# Altium PCB Temperature Controller.PcbDoc
Units mm, origin at the board's own origin, x right, y up, seen from the top; angles counter-clockwise.
Board outline 40 x 55 mm, 2 copper layers (Top Layer, Bottom Layer), stack 1.57 mm thick; 31 components, 21 nets, 97 pads, 309 vias.
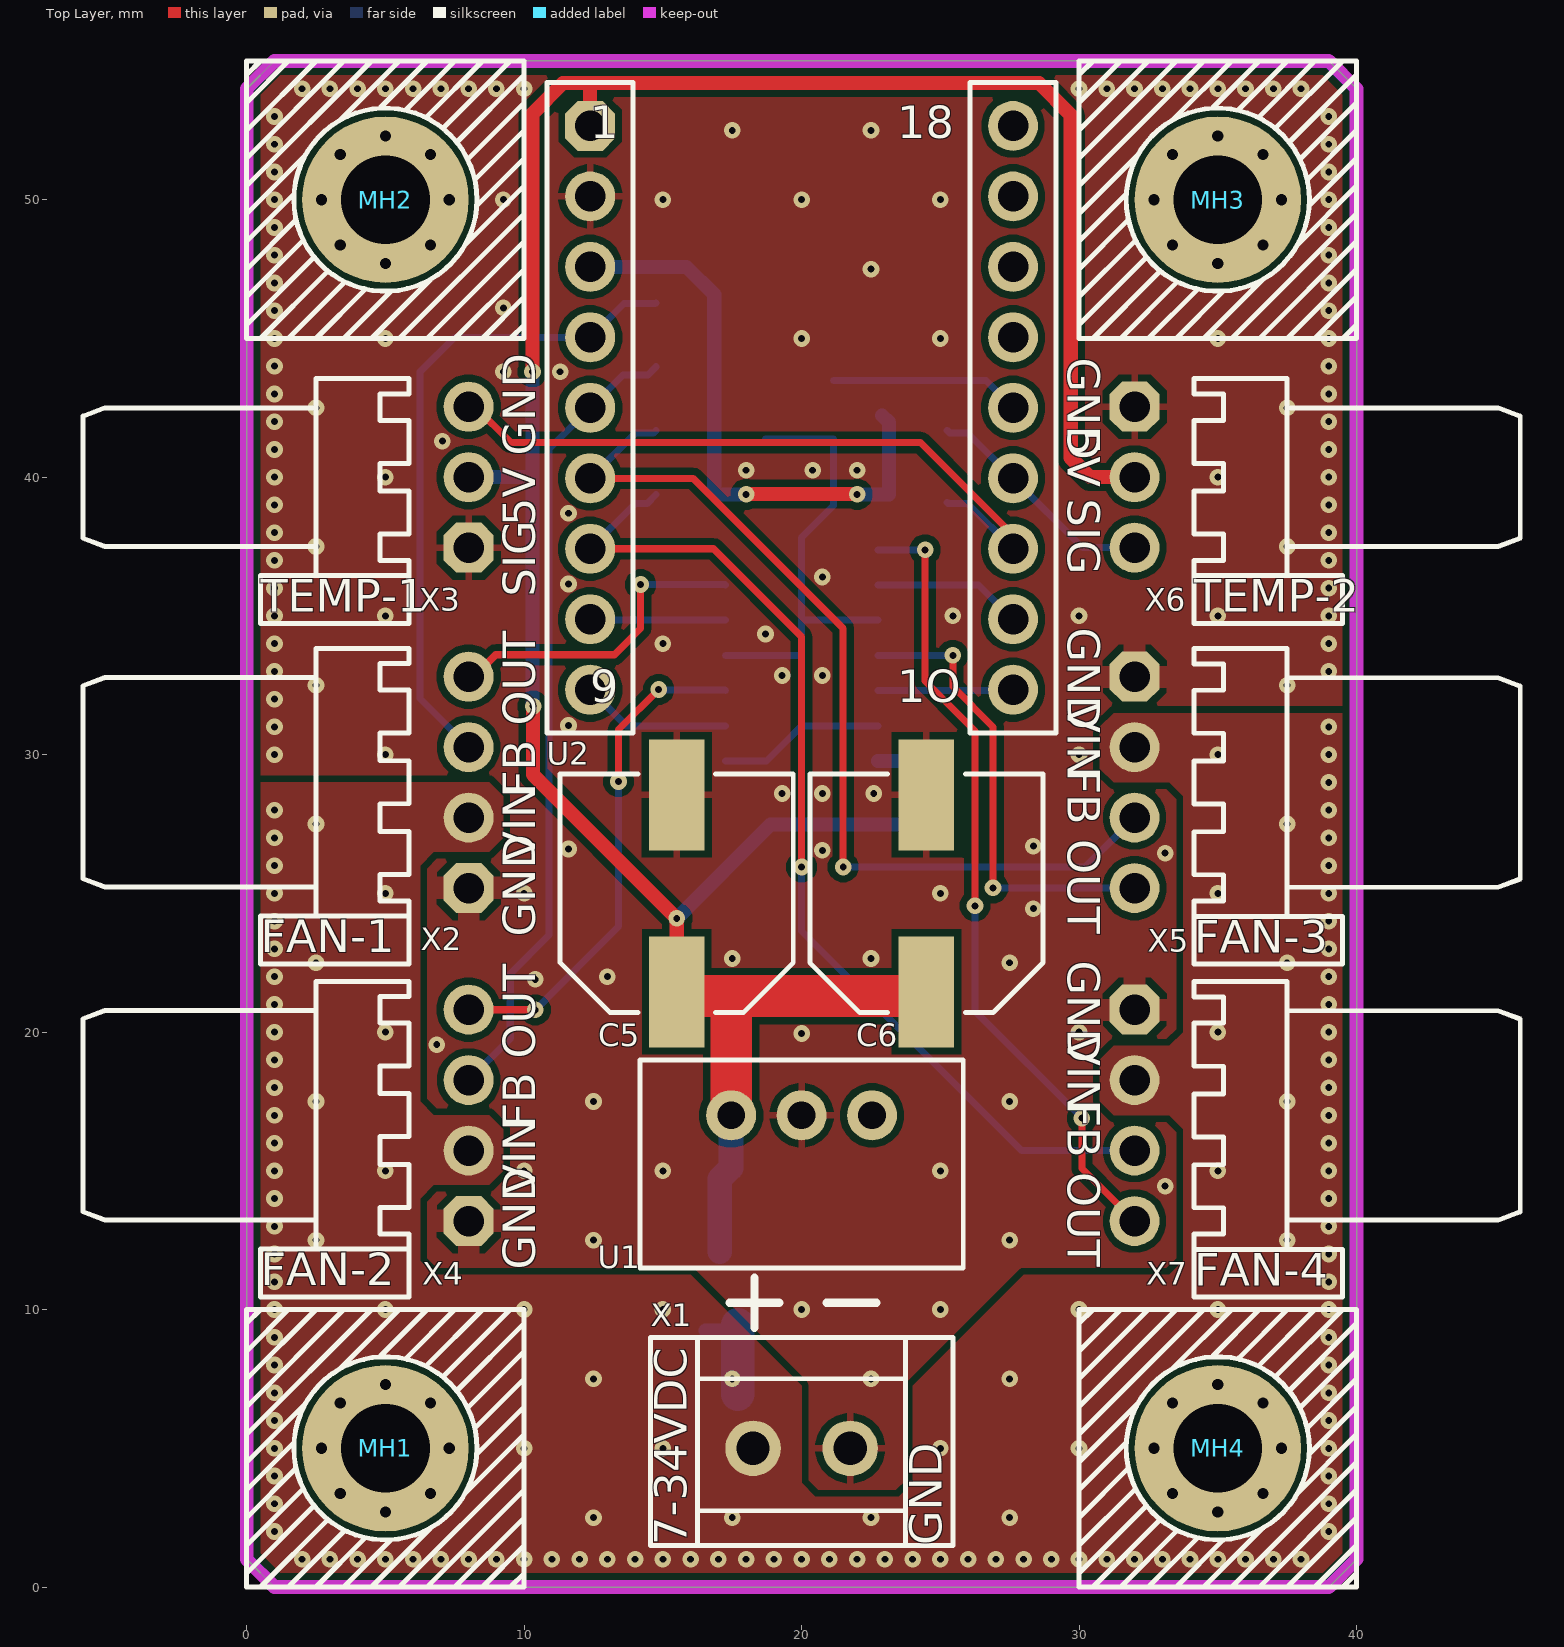
[diagram p0: Top Layer view]
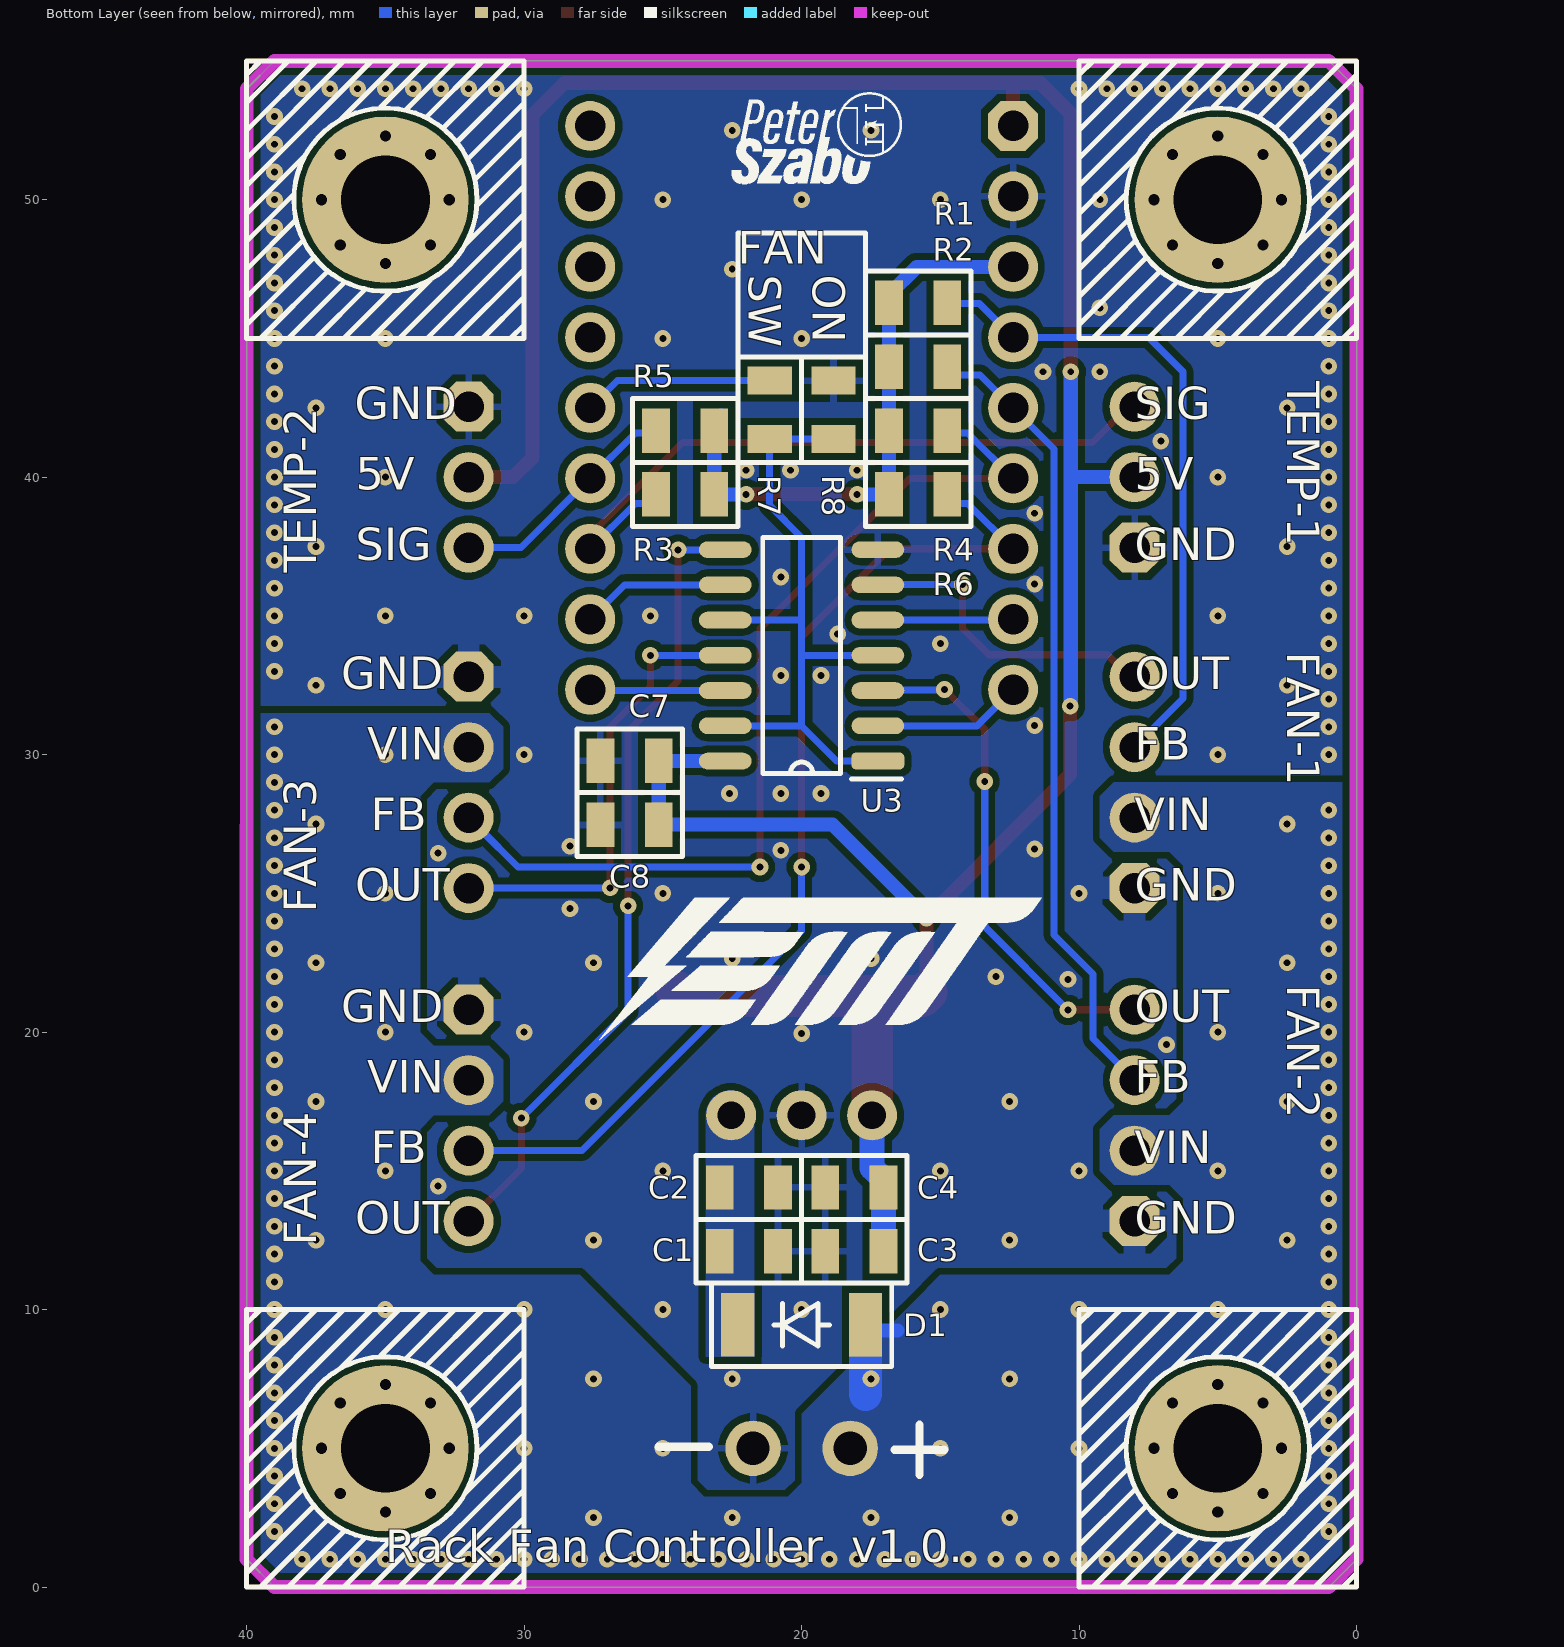
[diagram p1: Bottom Layer view, seen from below]

## Layer stack, top to bottom
Top Solder: solder mask 0.0102, Solder Resist, Dk 3.5
Top Layer: signal copper 0.035
Dielectric1: core 1.5, FR-4, Dk 4.8
Bottom Layer: signal copper 0.035
Bottom Solder: solder mask 0.0102, Solder Resist, Dk 3.5

## Board outline
1,55 39,55 40,54 40,1 39,0 1,0 0,1 0,54

## Design rules (kind name [scope] priority, off if disabled: settings)
AssemblyTestPointUsage [All] p1 off:
AssemblyTestpoint [All] p1 off: testpointundercomponent=TRUE minsize=1.016 maxsize=2.54 preferedsize=1.524 minholesize=0 maxholesize=1.016 preferedholesize=0.813 testpointgrid=0.025 usegrid=TRUE gridtolerance=0 allowsidetop=TRUE allowsidebottom=TRUE
Clearance ClearanceHV [InNetClass('HighVoltage')] p1: gap=0.5 ignorepadtopadclearanceinfootprint=FALSE except(0: Arc-Hole Track-Hole SMDPad-Hole THPad-Hole Via-Hole Fill-Hole Poly-Hole Region-Hole Text-Hole)
Clearance ClearanceFill [InPolygon vs InPolygon] p2: gap=0.25 ignorepadtopadclearanceinfootprint=FALSE except(0: Arc-Hole Track-Hole SMDPad-Hole THPad-Hole Via-Hole Fill-Hole Poly-Hole Region-Hole Text-Hole)
Clearance Poligone [InPolygon vs not InPolygon] p3: gap=0.25 ignorepadtopadclearanceinfootprint=FALSE except(0: Arc-Hole Track-Hole SMDPad-Hole THPad-Hole Via-Hole Fill-Hole Poly-Hole Region-Hole Text-Hole)
Clearance Clearance-xPP-xTP-xTT [All] p4: gap=0.15 ignorepadtopadclearanceinfootprint=FALSE except(0: Arc-Hole Track-Hole SMDPad-Hole THPad-Hole Via-Hole Fill-Hole Poly-Hole Region-Hole Text-Hole)
ComponentClearance [All] p1: gap=0.25 collisioncheckmode=3 verticalgap=0.25 showdistances=FALSE
DiffPairsRouting [All] p1: maxlimit=0.25 minlimit=0.15 mostfreqgap=0.25 toplayer_minwidth=0.254 toplayer_maxwidth=0.381 toplayer_prefwidth=0.381 bottomlayer_minwidth=0.254 bottomlayer_maxwidth=0.381 bottomlayer_prefwidth=0.381 substack1={06652235-AFCE-417E-9911-24E9A01F5C8B} toplayer_{06652235-afce-417e-9911-24e9a01f5c8b}_mingap=0.25 toplayer_{06652235-afce-417e-9911-24e9a01f5c8b}_minwidth=0.381 toplayer_{06652235-afce-417e-9911-24e9a01f5c8b}_maxwidth=0.381 toplayer_{06652235-afce-417e-9911-24e9a01f5c8b}_prefwidth=0.381 bottomlayer_{06652235-afce-417e-9911-24e9a01f5c8b}_mingap=0.25 bottomlayer_{06652235-afce-417e-9911-24e9a01f5c8b}_minwidth=0.381 bottomlayer_{06652235-afce-417e-9911-24e9a01f5c8b}_maxwidth=0.381 bottomlayer_{06652235-afce-417e-9911-24e9a01f5c8b}_prefwidth=0.381 maxuncoupledlength=12.5
FanoutControl Fanout_BGA [IsBGA] p1 off: bgadir=Out bgaviamode=Centered fanoutstyle=Auto fanoutdirection=Alternating viagrid=0.025 // Fanout_BGA (Default Rule)
Height [All] p1: minheight=0 maxheight=508 prefheight=12.5
HoleSize HoleSize-PTH [All] p1: absolutevalues=TRUE maxlimit=12.7 minlimit=0.25 maxpercent=80.000 minpercent=20.000
HoleToHoleClearance [All] p1: gap=0.15 allowstackedmicrovias=TRUE
MinimumAnnularRing "Minimum IAR  >0.45mm" [((ObjectKind = 'Pad') OR (ObjectKind = 'Via')) And (Layer = 'MultiLayer') And (HoleDiameter > AsMM(0.45))] p1: minimumring=0.125 // minimum inner annular ring for pads > 0.45mm finished hole size
MinimumAnnularRing "Minimum IAR <=0.45mm" [((ObjectKind = 'Pad') OR (ObjectKind = 'Via')) And (Layer = 'MultiLayer') And (HoleDiameter <= AsMM(0.45))] p2: minimumring=0.125 // minimum inner annular ring for pads <= 0.45mm finished hole size
MinimumSolderMaskSliver [All] p1: minsoldermaskwidth=0.1
PlaneClearance PlaneClearance-IPI [All] p1: clearance=0.4
PlaneConnect PlaneConnect_1 [All] p1: planeconnectstyle=Relief reliefexpansion=0.508 reliefentries=4 reliefconductorwidth=0.254 reliefairgap=0.254
PlaneConnect [All] p2: planeconnectstyle=Relief reliefexpansion=0.4 reliefentries=4 reliefconductorwidth=0.508 reliefairgap=0.254
PolygonConnect PolygonConnect-xTW [InNet('GND') vs IsVia] p1: connectstyle=Direct reliefconductorwidth=0.508 reliefentries=4 polygonreliefangle="90 Angle" airgapwidth=0.254
PolygonConnect PolygonConnect_1 [InNet('GND') vs (InComponent('X2')  Or   InComponent('X4') Or   InComponent('X5') Or   InComponent('X7'))] p2: connectstyle=Relief reliefconductorwidth=0.8 reliefentries=4 polygonreliefangle="90 Angle" airgapwidth=0.254
PolygonConnect PolygonConnect_2 [InNet('GND') vs not(IsVia)] p3: connectstyle=Relief reliefconductorwidth=0.254 reliefentries=4 polygonreliefangle="90 Angle" airgapwidth=0.254
PolygonConnect [All] p4: connectstyle=Direct reliefconductorwidth=0.381 reliefentries=4 polygonreliefangle="90 Angle" airgapwidth=0.25
RoomDefinition "Temperature Controller" [InComponentClass('Temperature Controller')] p1: confinementstyle=ConfineIn formatcopy=TRUE lockcomponents=FALSE outline 18.649,-23.6 47.999,-23.6 47.999,-13.8 18.649,-13.8
RoutingCorners [All] p1: cornerstyle=45-Degree minsetback=2.5 maxsetback=2.5
RoutingVias "RoutingVias > 0.45mm" [(ObjectKind = 'Via') And (HoleDiameter > AsMM(0.45))] p1: holewidth=0.25 width=0.6 viastyle="Through Hole" minholewidth=0.25 minwidth=0.5 maxholewidth=0.9 maxwidth=1.4 // finishet hole size > 0.45mm
RoutingVias "RoutingVias <= 0.45mm" [(ObjectKind = 'Via') And (HoleDiameter <= AsMM(0.45))] p2: holewidth=0.25 width=0.6 viastyle="Through Hole" minholewidth=0.25 minwidth=0.5 maxholewidth=0.5 maxwidth=1 // finishet hole size <= 0.45mm
SilkToSilkClearance [All] p1: silktosilkclearance=0.2
SilkToSolderMaskClearance SilkscreenOverComponentPads [IsPad] p1: minsilkscreentomaskgap=0.15 clearancetoexposedcopper=TRUE
SolderMaskExpansion [All] p1: expansion=0.1 istentingtop=FALSE
Width Width-xTW [All] p1: maxlimit=5 minlimit=0.23 preferedwidth=0.254 substack1={06652235-AFCE-417E-9911-24E9A01F5C8B} toplayer_{06652235-afce-417e-9911-24e9a01f5c8b}_maxwidth=2.54 bottomlayer_{06652235-afce-417e-9911-24e9a01f5c8b}_maxwidth=2.54
16 further rules are at their usual default settings.

## Classes and differential pairs
component class "Temperature Controller": C1 C3 C5 C7 C8 D1 MH1 MH2 MH3 MH4 R1 R2 R3 R4 R5 R6 R7 R8 U1 U2 U3 X1 X2 X3 X4 X5 X6 X7

## Components (designator, comment, footprint, x,y, rotation, side; value= is the part's Value field where it differs from the comment)
C1 "1uF" CAP-0805 21.9,12.1 r0 bottom
C2 "100nF" CAP-0805 21.9,14.4 r0 bottom
C3 "100nF" CAP-0805 18.1,12.1 r180 bottom
C4 "1uF" CAP-0805 18.1,14.4 r180 bottom
C5 "470uF" CAP-ELCO-SMD-FK1 15.5,25 r90 top
C6 "470uF" CAP-ELCO-SMD-FK1 24.5,25 r90 top
C7 "100nF" CAP-0805 26.2,29.78 r180 bottom
C8 "1uF" CAP-0805 26.2,27.48 r180 bottom
D1 "SL34F" D-SMAF 20,9.45 r0 bottom
MH1 "MECH-SCREW" MECH-M3-LARGE-EMPTY-DOUBLE-SUPPORT 5,5 r0 top locked value="M3 hole"
MH2 "MECH-SCREW" MECH-M3-LARGE-EMPTY-DOUBLE-SUPPORT 5,50 r0 top locked value="M3 hole"
MH3 "MECH-SCREW" MECH-M3-LARGE-EMPTY-DOUBLE-SUPPORT 35,50 r0 top locked value="M3 hole"
MH4 "MECH-SCREW" MECH-M3-LARGE-EMPTY-DOUBLE-SUPPORT 35,5 r0 top locked value="M3 hole"
R1 "4K7" RES-0805 15.8,46.28 r0 bottom
R2 "4K7" RES-0805 15.8,43.98 r0 bottom
R3 "4K7" RES-0805 24.2,39.38 r180 bottom
R4 "4K7" RES-0805 15.8,41.68 r0 bottom
R5 "4K7" RES-0805 24.2,41.68 r180 bottom
R6 "4K7" RES-0805 15.8,39.38 r0 bottom
R7 "0R" RES-0805 21.15,42.43 r270 bottom
R8 "0R" RES-0805 18.85,42.43 r270 bottom
U1 "AMSR-7805-NZ" IC-AMS-7805 20,17 r180 top
U2 "ESP32-C3-ZERO" MOD-ESP32-C3-ZERO 20,42.5 r0 top
U3 "74HCT125" IC-SOIC-14 20,33.58 r0 bottom
X1 "CONN-2P" CONN-2P-TERMINAL 20,5 r0 top value=TL002V-02P
X2 "CONN-4P" CONN-4P-NCW254 8,29 r90 top value=NCW254-04RR
X3 "CONN-3P" CONN-3P-NCW254 8,40 r90 top value=NCW254-03RR
X4 "CONN-4P" CONN-4P-NCW254 8,17 r90 top value=NCW254-04RR
X5 "CONN-4P" CONN-4P-NCW254 32,29 r270 top value=NCW254-04RR
X6 "CONN-3P" CONN-3P-NCW254 32,40 r270 top value=NCW254-03RR
X7 "CONN-4P" CONN-4P-NCW254 32,17 r270 top value=NCW254-04RR

## Footprints (in the part's own frame and the unit in brackets; to place one, negate y for a bottom-side part, rotate by r counter-clockwise, add the part's x,y. Pads: shape width x height; smd on the part's side, far side on the other; paste and mask are expansions set on the pad)
CAP-0805 [mm]
  rect 1x1.6 smd: 1(-1.05,0) 2(1.05,0)
  silkscreen extent -1.9,-1.15 1.9,1.15, body extent -1,-0.63 1,0.64, height 0.52
CAP-ELCO-SMD-FK1 [mm]
  rect 4x2 smd: 1(3.55,0) 2(-3.55,0)
  silkscreen extent -4.3,-4.2 4.3,4.2, body extent -4.85,-4.15 4.85,4.15, height 10.2
CONN-2P-TERMINAL [mm]
  round 2 hole 1.2: 1(-1.75,0) 2(1.75,0)
  silkscreen extent -3.75,-3.5 3.75,4, body extent -3.9,-3.5 3.5,3.9, height 8.6
CONN-3P-NCW254 [mm]
  oct 1.8x1.8 hole 1.1: 1(-2.54,0)
  round 1.8 hole 1.1: 2(0,0) 3(2.54,0)
  silkscreen extent -3.55,2.15 3.55,13.9, body extent -3.54,-0.3 3.54,13.9, height 5.85
CONN-4P-NCW254 [mm]
  oct 1.8x1.8 hole 1.1: 1(-3.81,0)
  round 1.8 hole 1.1: 2(-1.27,0) 3(1.27,0) 4(3.81,0)
  silkscreen extent -4.82,2.15 4.83,13.9, body extent -4.81,-0.3 4.81,13.9, height 5.85
D-SMAF [mm]
  rect 1.2x2.3 smd: A(-2.3,0) K(2.3,0)
  silkscreen extent -3.25,-1.5 3.25,1.5, body extent -2.65,-1.27 2.65,1.27, height 1
IC-AMS-7805 [mm]
  round 1.8 hole 1: 1(-2.54,0) 2(0,0) 3(2.54,0)
  silkscreen extent -5.83,-2 5.82,5.5, body extent -5.8,-2 5.8,5.5, height 10.16
IC-SOIC-14 [mm] "SOIC, 16-Leads, Body 9.9x3.9mm, Pitch 1.27mm, IPC High Density"
  rrect50% 1.9x0.6 smd: 1(-2.75,3.81)
  oval 1.9x0.6 smd: 2(-2.75,2.54) 3(-2.75,1.27) 4(-2.75,0) 5(-2.75,-1.27) 6(-2.75,-2.54) 7(-2.75,-3.81) 8(2.75,-3.81) 9(2.75,-2.54) 10(2.75,-1.27) 11(2.75,0) 12(2.75,1.27) 13(2.75,2.54) 14(2.75,3.81)
  silkscreen extent -3.6,-4.25 1.4,4.46, body extent -2.99,-4.32 2.99,4.33, height 1.35
MECH-M3-LARGE-EMPTY-DOUBLE-SUPPORT [mm]
  round 6 hole 3.2: MH(0,0)
  silkscreen extent -5,-5 5,5
MOD-ESP32-C3-ZERO [mm]
  oct 1.8x1.8 hole 1.1: 1(-7.62,10.16)
  round 1.8 hole 1.1: 2(-7.62,7.62) 3(-7.62,5.08) 4(-7.62,2.54) 5(-7.62,0) 6(-7.62,-2.54) 7(-7.62,-5.08) 8(-7.62,-7.62) 9(-7.62,-10.16) 10(7.62,-10.16) 11(7.62,-7.62) 12(7.62,-5.08) 13(7.62,-2.54) 14(7.62,0) 15(7.62,2.54) 16(7.62,5.08) 17(7.62,7.62) 18(7.62,10.16)
  silkscreen extent -9.17,-11.72 9.17,11.72, body extent -9,-11.75 9,13, height 16.01
RES-0805 [mm]
  rect 1x1.6 smd: 1(-1.05,0) 2(1.05,0)
  silkscreen extent -1.9,-1.15 1.9,1.15, body extent -1,-0.63 1,0.63, height 0.48

## Part data
C1 C4 C8: library part SPN-RES-6099, "Capacitor Non-Polar", Tolerance=X7R, Voltage=50V, Distributor=Lomex, Internal ID=SPN-RES-6099, Order number=82-10-21
C2 C3 C7: library part SPN-RES-6084, "Capacitor Non-Polar", Tolerance=X7R, Voltage=50V, Distributor=Lomex, Internal ID=SPN-RES-6084, Order number=82-13-46
C5 C6: library part SPN-RES-6223, "470uF 16V", Voltage=16V, Distributor=Lomex, Internal ID=SPN-RES-6223, Order number=91-01-32
D1: library part SPN-DIO-0204, "3A 40V SCH.RECT. Vf=0.45V", Distributor=Lomex, Internal ID=SPN-DIO-0204, Link=https://lomex.hu/pdf/(yet)_sl34f%20thru%20sl310f.pdf, Order number=83-07-60
MH1 MH2 MH3 MH4: library part SPN-CON-0000.32, "M3, large ring, double support silkscreen", Distributor=N/A, Internal ID=SPN-CON-0000.32, Order number=N/A
R1 R2 R3 R4 R5 R6: library part SPN-RES-5313, "Resistor", Distributor=Lomex, Internal ID=SPN-RES-5313, Order number=80-10-94
R7 R8: library part SPN-RES-5161, "Resistor", Distributor=Lomex, Internal ID=SPN-RES-5161, Order number=81-10-02
U1: library part SPN-MOD-0012, "Converter: DC/DC, 2.5W, Uin: 6.5-32V, Uout: 5VDC, Iout: 500mA", Distributor=TME, Internal ID=SPN-MOD-0012, Link=https://www.tme.eu/hu/details/amsr-7805z/dc-dc-konverterek/aimtec/, Order number=AMSR-7805Z
U2: library part SPN-MOD-0433, "ESP32-C3 mini fejlesztőkártya, ESP32-C3FN4, egymagos processzor, 160 MHz, 2,4 GHz Wi-Fi, Bluetooth 5", Distributor=Hestore, Internal ID=SPN-MOD-0433, Link=https://www.hestore.hu/prod_10046642.html#, Order number=100.466.42
U3: library part SPN-ICS-0434, "QUADRUPLE BUS BUFFER GATES / WITH 3-STATE OUTPUTS", Distributor=Hestore, Internal ID=SPN-ICS-0434, Link=https://www.hestore.hu/prod_10021575.html, Order number=100.215.75
X1: library part SPN-CON-0315, "SORKAPOCS 2 P RM3.50 TL002V-02P (TLM) LIFTES 1.5qmm 10A 130V VDE", Distributor=Lomex, Internal ID=SPN-CON-0315, Link=https://lomex.hu/pdf/(tlm)_tl002v-xp-xs.pdf, Order number=43-22-49
X2 X4 X5 X7: library part SPN-CON-0429, "TÁPCSATL. 2.54mm 4P APA 90° REVERSE NCW254-04RR (G-S) FORR.", Distributor=Lomex, Internal ID=SPN-CON-0429, Link=https://lomex.hu/pdf/t-t/(t-t)_ncw254-xxrr.pdf, Order number=43-18-04
X3 X6: library part SPN-CON-0428, "TÁPCSATL. 2.54mm 3P APA 90° REVERSE NCW254-03RR (G-S) FORR.", Distributor=Lomex, Internal ID=SPN-CON-0428, Link=https://lomex.hu/pdf/t-t/(t-t)_ncw254-xxrr.pdf, Order number=43-18-03

## Via types
v1: diameter 0.6, hole 0.25, Top Layer to Bottom Layer, tented both sides, 273 vias
v2: diameter 0.6, hole 0.4, Top Layer to Bottom Layer, tented both sides, 36 vias

## Nets (pads, with @x,y where several pads share a name; then routed paths per layer and width w, separated by ;. In a path a pad name is that pad's centre, name@x,y a point inside that pad or via, vN(x,y) a via of type N, cw(c..) or ccw(c..) an arc to the next point about the centre after c; other vN are vias at no path point)
3V3: R1.2 R2.2 R3.2 R4.2 R5.2 R6.2 U2.3 | length 21.3
  Top Layer w0.508: v1@17.983,39.4 17.986,39.398 18.083,39.398 18.085,39.4 21.955,39.4 21.957,39.398 21.981,39.398 v1@21.983,39.4
  Bottom Layer w0.508: U2.3 15.85,47.58 16.85,46.58 R2.2 R4.2 R6.2 v1(18,39.38) ; v1(22,39.38) R3.2 R5.2 23.15,41.98 R5.2@22.904,42.226
5V: C3.2 C4.2 C5.2 C6.2 C7.2 C8.2 U1.3 U2.1 U3.14 X3.2 X6.2 | length 107.3
  Top Layer w0.508: v1(10.3,43.8) 10.3,53.1 11.4,54.2 12.35,54.2 ; v1(10.323,31.75) 10.323,29.277 v1(15.5,24.1) C5.2 ; U2.1 12.38,54.17 12.35,54.2 ; X6.2 30.4,40 29.7,40.7 29.7,53.05 28.55,54.2 12.35,54.2
  Top Layer w1.5: C5.2 15.65,21.3 17.35,21.3 ; U1.3@17.403,17.057 U1.3 17.46,21.19 17.35,21.3 ; C6.2 24.35,21.3 17.35,21.3
  Bottom Layer w0.508: X3.2 10.3,40 ; v1(10.3,43.8) 10.3,40 ; v1(10.323,31.75) 10.305,31.768 10.305,31.795 10.3,31.8 10.3,40 ; v1(15.5,24.1) 18.88,27.48 C8.2 C7.2 25.14,29.77 U3.14
  Bottom Layer w0.9: C3.2 C4.2 17.05,14.7 17.46,15.11 U1.3
FAN_1_PWM: U2.8 U3.5 | length 4.9
  Bottom Layer w0.254: U2.8 12.41,34.85 U3.5
FAN_1_PWM_EXT: U3.6 X2.4 | length 11.6
  Top Layer w0.254: X2.4 8.187,32.81 8.977,33.6 13.25,33.6 14.2,34.55 v1(14.2,36.13)
  Bottom Layer w0.254: v1(14.2,36.13) 14.205,36.125 17.245,36.125 U3.6
FAN_1_SENSE: R1.1 U2.4 X2.3 | length 23.8
  Bottom Layer w0.254: X2.3 6.25,32.02 6.25,43.8 7.49,45.04 U2.4 13.598,46.258 14.728,46.258 R1.1
FAN_2_PWM: U2.9 U3.2 | length 5.4
  Bottom Layer w0.254: U2.9 13.68,31.04 U3.2
FAN_2_PWM_EXT: U3.3 X4.4 | length 18.2
  Top Layer w0.254: X4.4 8.005,20.805 10.395,20.805 v1(10.4,20.8) ; v1(13.4,29.03) 13.4,30.9 v1(14.85,32.35)
  Bottom Layer w0.254: v1(10.4,20.8) 13.4,23.8 v1(13.4,29.03) ; v1(14.85,32.35) 14.87,32.33 17.23,32.33 U3.3
FAN_2_SENSE: R2.1 U2.5 X4.3 | length 29
  Bottom Layer w0.254: X4.3 9.5,19.77 9.5,22.1 10.9,23.5 10.9,41.02 13.568,43.688 14.458,43.688 R2.1
FAN_3_PWM: U2.10 U3.12 | length 4.9
  Bottom Layer w0.254: U3.12 27.59,32.31 U2.10
FAN_3_PWM_EXT: U3.11 X5.4 | length 17
  Top Layer w0.254: v1(25.45,33.58) 25.45,32.45 26.9,31 v1(26.9,25.2)
  Bottom Layer w0.254: U3.11 v1(25.45,33.58) ; v1(26.9,25.2) 26.905,25.195 31.575,25.195 X5.4@31.995,24.775
FAN_3_SENSE: R4.1 U2.6 X5.3 | length 34.1
  Top Layer w0.254: U2.6 16.09,39.96 21.5,34.55 v1(21.5,25.95)
  Bottom Layer w0.254: U2.6 14.018,41.598 14.668,41.598 R4.1@14.748,41.678 ; v1(21.5,25.95) 30.22,25.95 31.58,27.31 X5.3@32,27.31
FAN_4_PWM: U2.11 U3.9 | length 5.4
  Bottom Layer w0.254: U3.9 26.38,36.12 U2.11
FAN_4_PWM_EXT: U3.8 X7.4 | length 29
  Top Layer w0.254: v1(24.45,37.38) 24.45,32.65 26.25,30.85 v1(26.25,24.55) ; v1(30.1,16.9) 30.1,15.09 X7.4
  Bottom Layer w0.254: U3.8@22.76,37.38 v1(24.45,37.38) ; v1(26.25,24.55) 26.25,20.75 v1(30.1,16.9)
FAN_4_SENSE: R6.1 U2.7 X7.3 | length 38
  Top Layer w0.254: U2.7 16.83,37.42 20,34.25 v1(20,25.95)
  Bottom Layer w0.254: U2.7 14.018,39.058 14.438,39.058 R6.1@14.75,39.37 ; v1(20,25.95) 20,23.65 27.92,15.73 X7.3
FAN_nENABLE: R7.1 U2.14 | length 6.9
  Bottom Layer w0.254: R7.1 26.64,43.48 U2.14
GND: C1.1 C2.1 C3.1 C4.1 C5.1 C6.1 C7.1 C8.1 R8.1 U1.2 U2.2 U3.7 X1.2 X2.1 X3.1 X4.1 X5.1 X6.1 X7.1
  other v1: 22.5,7.5 20,10 25,10 12.5,12.5 27.5,12.5 33.1,14.45 10,15 15,15 25,15 12.5,17.5 27.5,17.5 6.85,19.55 20,19.95 30,20 10.4,21.9 13,22 27.5,22.5 17.5,22.65 22.5,22.65 28.35,24.45 10,25 25,25 33.1,26.45 20.75,26.55 11.6,26.6 28.35,26.7 19.3,28.6 20.75,28.6 22.6,28.6 1,30 5,30 30,30 1,31 11.6,31.05 1,32 2.5,32.5 37.5,32.5 19.3,32.85 20.75,32.85 1,33 39,33 1,34 15,34 39,34 18.7,34.35 1,35 5,35 25.45,35 30,35 35,35 39,35 1,36 39,36 11.6,36.15 20.75,36.4 1,37 39,37 2.5,37.5 37.5,37.5 1,38 39,38 11.6,38.7 1,39 39,39 1,40 5,40 35,40 39,40 18,40.25 20.4,40.25 22,40.25 1,41 39,41 7.05,41.3 1,42 39,42 2.5,42.5 37.5,42.5 1,43 39,43 9.25,43.8 11.3,43.8 1,44 39,44 1,45 5,45 20,45 25,45 35,45 39,45 1,46 39,46 9.25,46.1 1,47 39,47 22.5,47.5 1,48 39,48 1,49 39,49 1,50 9.25,50 15,50 20,50 25,50 39,50 1,51 39,51 1,52 39,52 17.5,52.5 22.5,52.5 1,53 39,53 2,54 3,54 4,54 5,54 6,54 7,54 8,54 9,54 10,54 30,54 31,54 32,54 33,54 34,54 35,54 36,54 37,54 38,54
NetC1_2: C1.2 C2.2 D1.K U1.1 | length 0.1
  Top Layer w1.5: U1.1 U1.1@22.597,17.057
NetR7_2: R7.2 R8.2 U3.1 U3.4 U3.10 U3.13 | length 24.8
  Bottom Layer w0.254: U3.1 18.74,29.77 20,31.03 ; U3.4 20,33.58 ; R8.2@18.702,41.38 R7.2 21.15,38.98 20,37.83 20,34.83 ; U3.13 20.01,31.04 20,31.03 ; U3.10 20.02,34.85 20,34.83 ; 20,31.03 20,33.58 ; 20,33.58 20,34.83
TEMP_1_IN: R3.1 U2.12 X3.3 | length 24.6
  Top Layer w0.254: X3.3 8.232,42.54 9.522,41.25 24.29,41.25 U2.12@27.62,37.92
  Bottom Layer w0.254: R3.1@25.25,39.088 25.28,39.058 25.982,39.058 U2.12
TEMP_2_IN: R5.1 U2.13 X6.3 | length 8.5
  Bottom Layer w0.254: R5.1 25.332,41.598 25.982,41.598 U2.13 30.12,37.46 X6.3
VIN: D1.A X1.1 X2.2 X4.2 X5.2 X7.2 | length 3.7
  Bottom Layer w0.5: 16.54,9.25 D1.A@17.7,9.25
  Bottom Layer w1.2: 17.7,6.95 D1.A
  other v1: 2,1 3,1 4,1 5,1 6,1 7,1 8,1 9,1 10,1 11,1 12,1 13,1 14,1 15,1 16,1 17,1 18,1 19,1 20,1 21,1 22,1 23,1 24,1 25,1 26,1 27,1 28,1 29,1 30,1 31,1 32,1 33,1 34,1 35,1 36,1 37,1 38,1 1,2 39,2 12.5,2.5 17.5,2.5 22.5,2.5 27.5,2.5 1,3 39,3 1,4 39,4 1,5 10,5 15,5 25,5 30,5 39,5 1,6 39,6 1,7 39,7 12.5,7.5 17.5,7.5 27.5,7.5 1,8 39,8 1,9 39,9 1,10 5,10 10,10 15,10 30,10 35,10 39,10 1,11 39,11 1,12 39,12 2.5,12.5 37.5,12.5 1,13 39,13 1,14 39,14 1,15 5,15 35,15 39,15 1,16 39,16 1,17 39,17 2.5,17.5 37.5,17.5 1,18 39,18 1,19 39,19 1,20 5,20 35,20 39,20 1,21 39,21 1,22 39,22 2.5,22.5 37.5,22.5 1,23 39,23 1,24 39,24 1,25 5,25 35,25 39,25 1,26 39,26 1,27 39,27 2.5,27.5 37.5,27.5 1,28 39,28 39,29 35,30 39,30 39,31
pads on no net: MH1.MH MH2.MH MH3.MH MH4.MH U2.15 U2.16 U2.17 U2.18
copper on no net:
  other v2: 5,2.7 35,2.7 3.374,3.374 6.626,3.374 33.374,3.374 36.626,3.374 2.7,5 7.3,5 32.7,5 37.3,5 3.374,6.626 6.626,6.626 33.374,6.626 36.626,6.626 5,7.3 5,7.3 35,7.3 35,7.3 5,47.7 35,47.7 3.374,48.374 6.626,48.374 33.374,48.374 36.626,48.374 2.7,50 7.3,50 32.7,50 37.3,50 3.374,51.626 6.626,51.626 33.374,51.626 36.626,51.626 5,52.3 5,52.3 35,52.3 35,52.3

## Polygon pours and split planes (outlines as drawn)
GND on Bottom Layer "GND_L02_P007" (solid, remove dead copper, pour order 7): 0,55 0,0 40,0 40,55
VIN on Bottom Layer "VIN_L02_P006" (solid, remove dead copper, pour order 6): 9.25,28.5 9.25,27 8.75,26.5 6.75,26.5 6.25,26 6.25,17.5 6.75,17 8.75,17 9.25,16.5 9.25,15 8.75,14.5 6.75,14.5 6.25,14 6.25,11.75 6.75,11.25 15,11.25 16,10.25 18.7,7.55 20,6.25 20,3.75 20.5,3.25 23.5,3.25 24,3.75 24,7.25 28,11.25 33.25,11.25 33.75,11.75 33.75,16.5 33.25,17 31.25,17 30.75,17.5 30.75,19 31.25,19.5 33.25,19.5 33.75,20 33.75,28.5 33.25,29 31.25,29 30.75,29.5 30.75,31 31.25,31.5 40,31.5 40,0 0,0 0,29 8.75,29
NetC1_2 on Bottom Layer "NETC1_2_L02_P000" (solid, remove dead copper, pour order 0): 21.7,8.3 21.7,17.05 cw(c22.55,17.05) 22.55,17.9 cw(c22.55,17) 23.45,17 23.45,8.3
GND on Top Layer "GND_L01_P008" (solid, remove dead copper, pour order 8): 0,55 0,0 40,0 40,55
VIN on Top Layer "VIN_L01_P005" (solid, remove dead copper, pour order 5): 9.25,28.5 9.25,27 8.75,26.5 6.75,26.5 6.25,26 6.25,17.5 6.75,17 8.75,17 9.25,16.5 9.25,15 8.75,14.5 6.75,14.5 6.25,14 6.25,11.75 6.75,11.25 16,11.25 20,7.25 20,3.75 20.5,3.25 23.5,3.25 24,3.75 24,7.25 28,11.25 33.25,11.25 33.75,11.75 33.75,16.5 33.25,17 31.25,17 30.75,17.5 30.75,19 31.25,19.5 33.25,19.5 33.75,20 33.75,28.5 33.25,29 31.25,29 30.75,29.5 30.75,31 31.25,31.5 40,31.5 40,0 0,0 0,29 8.75,29

## Keep-outs
Keep-Out Layer:
  the board outline again, w0.5

## Silkscreen, mask and mechanical layers (free items; w line width, h text height)
Top Overlay:
  lines w0.178: 2.5,12.18 0.5,12.18 0.5,10.46 5.85,10.46 5.85,12.18 ; 2.5,24.18 0.5,24.18 0.5,22.46 5.85,22.46 5.85,24.18 ; 2.5,36.45 0.5,36.45 0.5,34.73 5.85,34.73 5.85,36.45 ; 16.25,1.5 14.55,1.5 14.55,9 16.25,9 ; 23.75,1.5 25.45,1.5 25.45,9 23.75,9 ; 34.15,12.17 34.15,10.45 39.5,10.45 39.5,12.17 37.5,12.17 ; 34.15,24.17 34.15,22.45 39.5,22.45 39.5,24.17 37.5,24.17 ; 34.15,36.45 34.15,34.73 39.5,34.73 39.5,36.45 37.5,36.45
  lines w0.3: 17.4,10.25 19.2,10.25 ; 18.3,9.35 18.3,11.15 ; 20.9,10.25 22.7,10.25
  text "GND" at 29.2,44.302 h2 r270
  text "5V" at 29.2,41.762 h2 r270
  text "GND" at 10.8,40.778 h2 r90
  text "SIG" at 29.2,39.222 h2 r270
  text "5V" at 10.8,38.238 h2 r90
  text "SIG" at 10.8,35.698 h2 r90
  text "TEMP-1" at 0.5,34.75 h2
  text "TEMP-2" at 34.15,34.75 h2
  text "GND" at 29.2,34.572 h2 r270
  text "VIN" at 29.2,31.862 h2 r270
  text "OUT" at 10.8,31.048 h2 r90
  text "FB" at 29.2,29.492 h2 r270
  text "FB" at 10.8,28.508 h2 r90
  text "OUT" at 29.2,26.952 h2 r270
  text "VIN" at 10.8,26.138 h2 r90
  text "GND" at 10.8,23.428 h2 r90
  text "GND" at 29.2,22.572 h2 r270
  text "FAN-1" at 0.5,22.48 h2
  text "FAN-3" at 34.15,22.47 h2
  text "VIN" at 29.2,19.863 h2 r270
  text "OUT" at 10.8,19.048 h2 r90
  text "FB" at 29.2,17.492 h2 r270
  text "FB" at 10.8,16.508 h2 r90
  text "OUT" at 29.2,14.952 h2 r270
  text "VIN" at 10.8,14.138 h2 r90
  text "GND" at 10.8,11.428 h2 r90
  text "FAN-2" at 0.5,10.48 h2
  text "FAN-4" at 34.15,10.47 h2
  text "7-34VDC" at 16.25,1.5 h2 r90
  text "GND" at 25.45,1.5 h2 r90
Bottom Overlay:
  drawing of 24 lines, arcs and shapes, not listed
  text "ON" at 20,47.3 h2 r90
  text "FAN" at 22.3,47.3 h2
  text "SW" at 22.3,47.3 h2 r90
  text "TEMP-1" at 2.9,43.45 h2 r90
  text "SIG" at 8,41.69 h2
  text "GND" at 36.103,41.69 h2
  text "5V" at 8,39.15 h2
  text "5V" at 36.077,39.15 h2
  text "GND" at 8,36.61 h2
  text "SIG" at 36.077,36.61 h2
  text "TEMP-2" at 37.1,36.55 h2 r270
  text "FAN-1" at 2.9,33.7 h2 r90
  text "OUT" at 8,31.96 h2
  text "GND" at 36.599,31.96 h2
  text "FB" at 8,29.42 h2
  text "VIN" at 35.653,29.42 h2
  text "VIN" at 8,26.88 h2
  text "FB" at 35.525,26.88 h2
  text "GND" at 8,24.34 h2
  text "OUT" at 36.079,24.34 h2
  text "FAN-3" at 37.1,24.3 h2 r270
  text "FAN-2" at 2.9,21.7 h2 r90
  text "OUT" at 8,19.96 h2
  text "GND" at 36.599,19.96 h2
  text "FB" at 8,17.42 h2
  text "VIN" at 35.653,17.42 h2
  text "VIN" at 8,14.88 h2
  text "FB" at 35.525,14.88 h2
  text "GND" at 8,12.34 h2
  text "OUT" at 36.079,12.34 h2
  text "FAN-4" at 37.1,12.3 h2 r270
  text "Rack Fan Controller  v1.0." at 35,0.5 h2
Mechanical 2-BoardOutline:
  the board outline again, w0.254

## Dimensions
0,55 to 40,55 on Mechanical 3 - Dimensions
35,50 to 40,54 on Mechanical 3 - Dimensions
5,50 to 35,50 on Mechanical 3 - Dimensions
5,50 to 0,54 on Mechanical 3 - Dimensions
0,0 to 0.5,55 on Mechanical 3 - Dimensions
5,5 to 1,0 on Mechanical 3 - Dimensions
5,50 to 5,5 on Mechanical 3 - Dimensions
5,50 to 1,55 on Mechanical 3 - Dimensions

## Text inside footprints (layer, text, board x,y; h text height)
U2: Top Overlay "1O" at 23.454,31.49 h2; Top Overlay "18" at 23.454,51.81 h2; Top Overlay "9" at 12.38,31.49 h2; Top Overlay "1" at 12.38,51.81 h2